# Altium PCB frame_size.PcbDoc
Units mm, origin at the board's own origin, x right, y up, seen from the top; angles counter-clockwise.
Board outline 38.15 x 44.65 mm, 2 copper layers (Top Layer, Bottom Layer); 2 components, 7 nets, 21 pads, 0 vias.
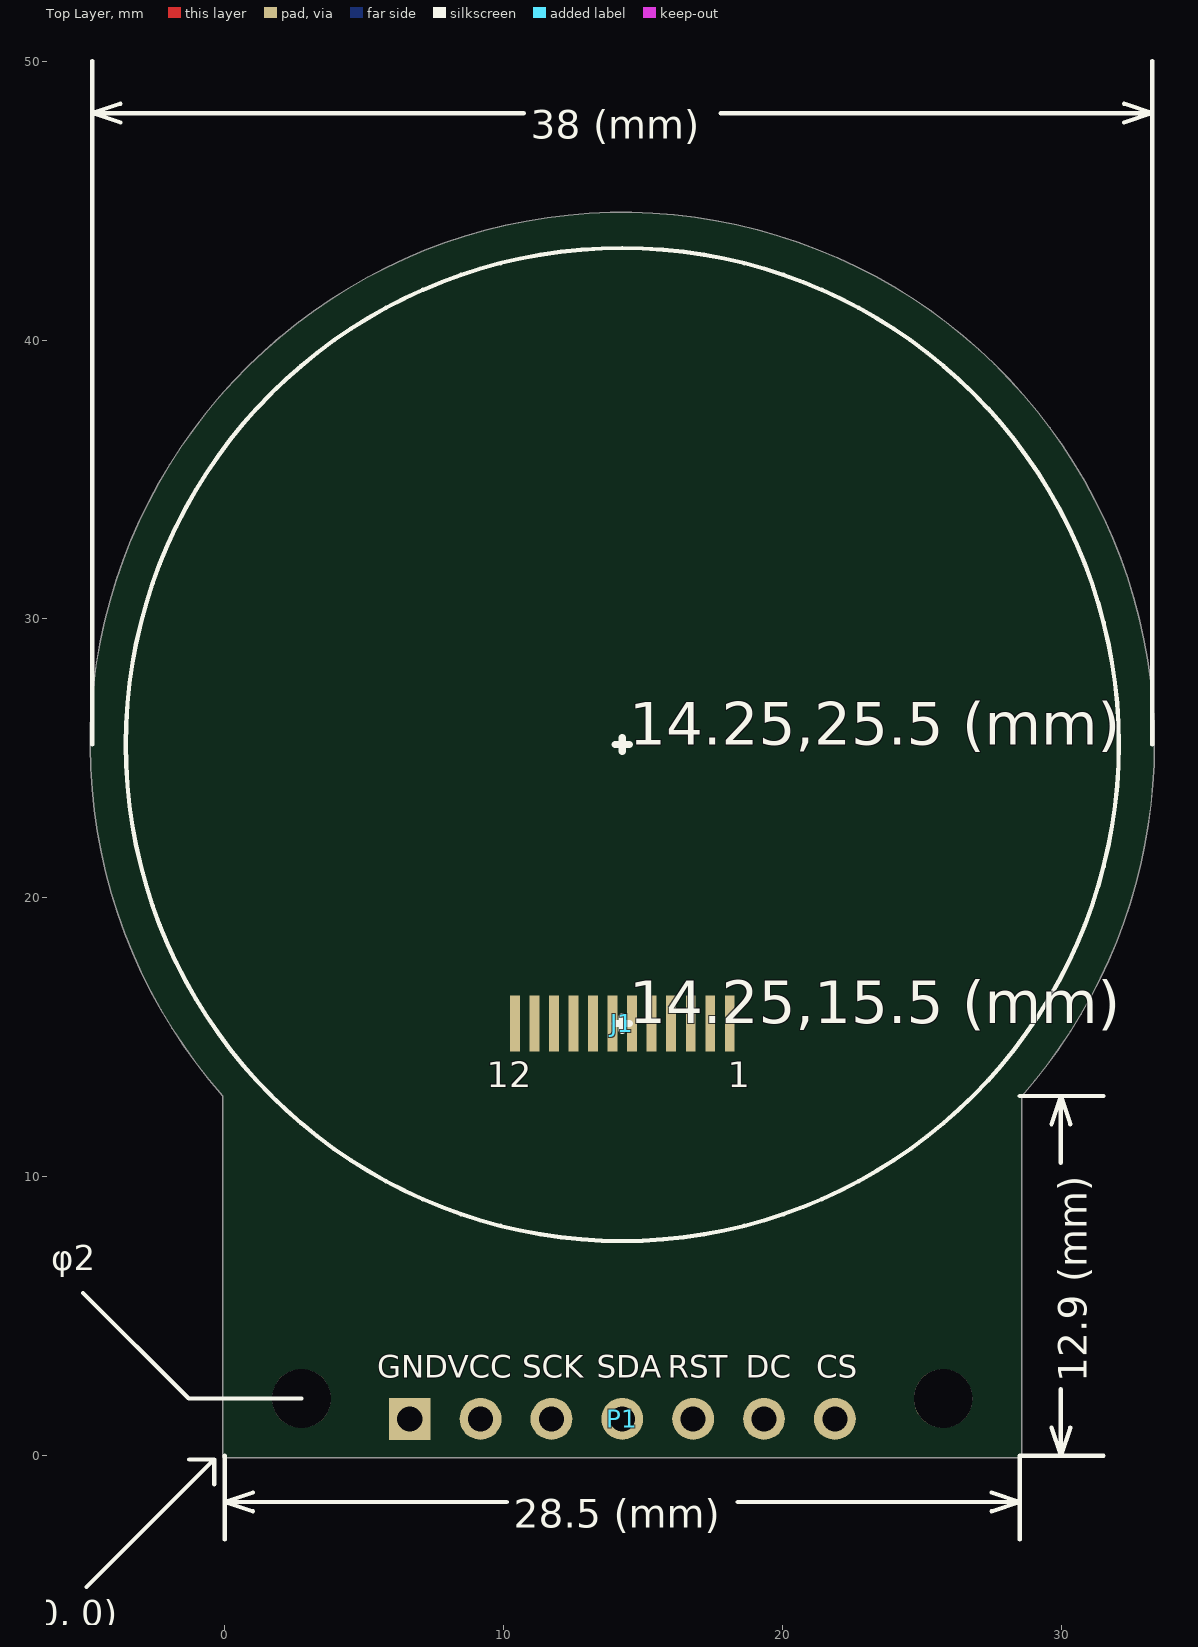
[diagram p0: Top Layer view]
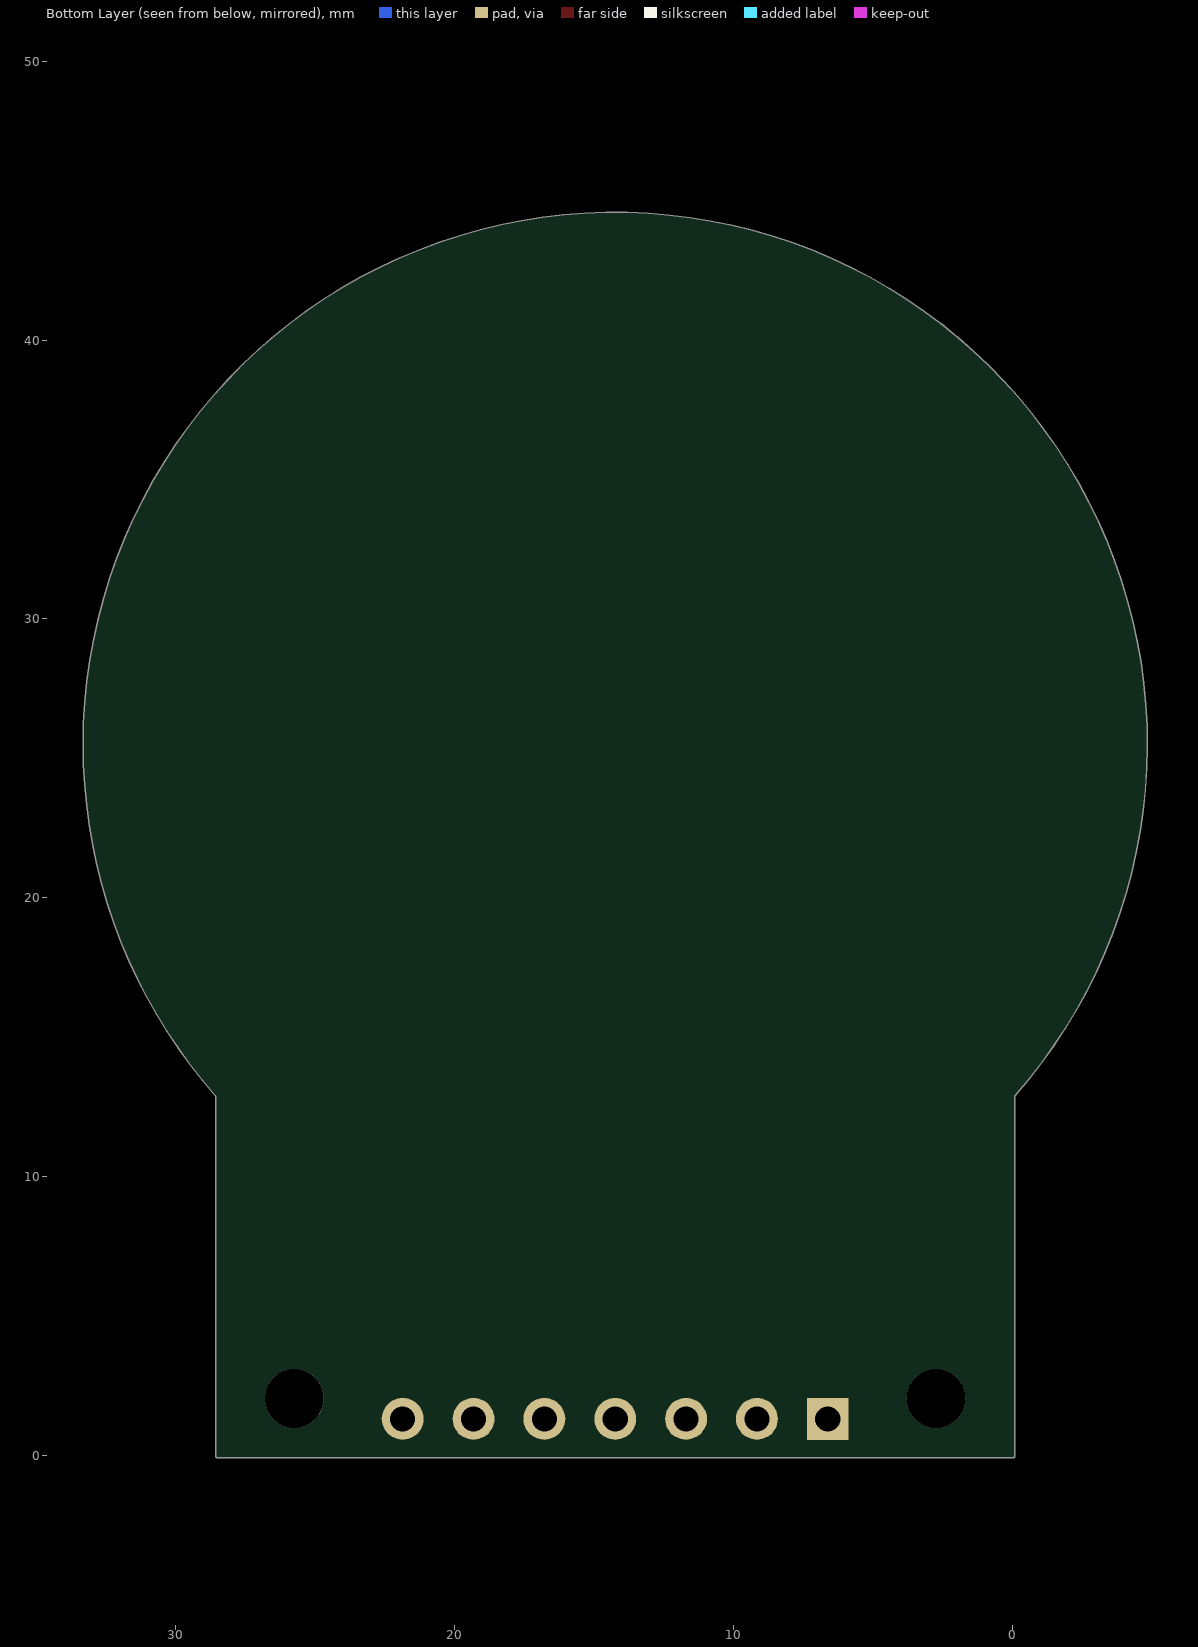
[diagram p1: Bottom Layer view, seen from below]

## Layer stack, top to bottom
Top Solder: solder mask 0.0102, Solder Resist, Dk 3.5
Top Layer: signal copper 0.0356
Dielectric 1: dielectric 0.32, FR-4, Dk 4.8
Bottom Layer: signal copper 0.0356
Bottom Solder: solder mask 0.0102, Solder Resist, Dk 3.5

## Board outline
-0.077,0 -0.077,12.9 cw(c0,12.9) -0.077,12.9 cw(c0,12.9) -0.076,12.904 -0.077,12.904 cw(c14.25,25.5) 33.327,25.5 cw(c14.25,25.5) 28.577,12.904 cw(c28.5,12.901) 28.577,12.901 cw(c28.5,12.901) 28.577,12.9 ccw(c28.5,12.9) 28.576,12.904 28.577,12.9 cw(c28.5,12.9) 28.577,12.9 28.577,0 cw(c28.5,0) 28.5,-0.077 0,-0.077 cw(c0,0)

## Design rules (kind name [scope] priority, off if disabled: settings)
Clearance [All] p1: gap=0.152
PolygonConnect [All] p1: connectstyle=Relief reliefconductorwidth=0.254 reliefentries=4 polygonreliefangle="90 Angle" airgapwidth=0.254
RoutingVias [All] p1: holewidth=0.711 width=1.27 viastyle="Through Hole" minholewidth=0.711 minwidth=1.27 maxholewidth=0.711 maxwidth=1.27
SolderMaskExpansion [All] p1: expansion=0.102
Width [All] p1: maxlimit=0.508 minlimit=0.254 preferedwidth=0.254
30 further rules are at their usual default settings.

## Components (designator, comment, footprint, x,y, rotation, side; value= is the part's Value field where it differs from the comment)
J1 "FPC-12 Connect Pad" "FPC12 PADDING" 14.25,15.5 r0 top
P1 "Header 7" HDR1X7 14.25,1.325 r0 top

## Footprints (in the part's own frame and the unit in brackets; to place one, negate y for a bottom-side part, rotate by r counter-clockwise, add the part's x,y. Pads: shape width x height; smd on the part's side, far side on the other; paste and mask are expansions set on the pad)
"FPC12 PADDING" [mm]
  rect 0.35x2 smd: 1(3.85,0) 2(3.15,0) 3(2.45,0) 4(1.75,0) 5(1.05,0) 6(0.35,0) 7(-0.35,0) 8(-1.05,0) 9(-1.75,0) 10(-2.45,0) 11(-3.15,0) 12(-3.85,0)
HDR1X7 [mm] "Connector; Header; 7 Position"
  rect 1.5x1.5 hole 0.9: 1(-7.62,0)
  round 1.5 hole 0.9: 2(-5.08,0) 3(-2.54,0) 4(0,0) 5(2.54,0) 6(5.08,0) 7(7.62,0)
  body extent -8.89,-1.27 8.89,1.27, height 3.05

## Part data
P1: "Header, 7-Pin"

## Free pads (board coordinates)
  round 2.1 hole 2.1 unplated: ""(2.75,2.055) ""(25.75,2.055)

## Nets (pads, with @x,y where several pads share a name; then routed paths per layer and width w, separated by ;. In a path a pad name is that pad's centre, name@x,y a point inside that pad or via, vN(x,y) a via of type N, cw(c..) or ccw(c..) an arc to the next point about the centre after c; other vN are vias at no path point)
GND: 
LCD_CSX: 
LCD_DCX: 
LCD_RST: 
LCD_SCK: 
LCD_SDA: 
VCC_3V3: 
pads on no net: J1.1 J1.2 J1.3 J1.4 J1.5 J1.6 J1.7 J1.8 J1.9 J1.10 J1.11 J1.12 P1.1 P1.2 P1.3 P1.4 P1.5 P1.6 P1.7

## Silkscreen, mask and mechanical layers (free items; w line width, h text height)
Top Overlay:
  circle w0.152: c14.25,25.5 r17.8
  lines w0.152: -5.08,5.842 -1.293,2.055 2.75,2.055 ; -4.953,-4.699 -0.381,-0.127 ; -4.75,25.5 -4.75,50 ; -4.75,47.879 -4.75,48.387 ; -3.734,47.794 -4.75,48.133 ; -3.734,48.472 -4.75,48.133 ; -0.381,-1.016 -0.381,-0.127 ; 0,-3 0,0 ; 0,-1.905 0,-1.397 ; 1.016,-1.99 0,-1.651 ; 1.016,-1.312 0,-1.651 ; 10.109,-1.651 0,-1.651 ; 10.721,48.133 -4.75,48.133 ; 17.779,48.133 33.25,48.133 ; 18.391,-1.651 28.5,-1.651 ; 27.484,-1.99 28.5,-1.651 ; 27.484,-1.312 28.5,-1.651 ; 28.5,-3 28.5,0 31.5,0 ; 28.5,-1.905 28.5,-1.397 ; 28.5,12.9 31.5,12.9 ; 29.633,1.016 29.972,0 ; 29.633,11.884 29.972,12.9 ; 29.718,0 30.226,0 ; 29.718,12.9 30.226,12.9 ; 29.972,2.389 29.972,0 ; 29.972,10.511 29.972,12.9 ; 30.311,1.016 29.972,0 ; 30.311,11.884 29.972,12.9 ; 32.234,47.794 33.25,48.133 ; 32.234,48.472 33.25,48.133 ; 33.25,25.5 33.25,50 ; 33.25,47.879 33.25,48.387 ; -0.381,-0.127 -1.27,-0.127 -0.381,-0.127
  lines w0.254: 13.996,15.5 14.504,15.5 ; 13.996,25.5 14.504,25.5 ; 14.25,15.246 14.25,15.754 ; 14.25,25.246 14.25,25.754
  text "38 (mm)" at 10.975,47.207 h1.02
  text "14.25,25.5 (mm)" at 14.504,25.5 h1.52
  text "14.25,15.5 (mm)" at 14.504,15.5 h1.52
  text "φ2" at -6.223,6.35 h1.52
  text "GND" at 5.461,2.794 h0.81
  text "VCC" at 8.001,2.794 h0.81
  text "SCK" at 10.668,2.794 h0.81
  text "SDA" at 13.335,2.794 h0.81
  text "RST" at 15.875,2.794 h0.81
  text "DC" at 18.669,2.794 h0.81
  text "CS" at 21.209,2.794 h0.81
  text "12.9 (mm)" at 30.898,2.643 h1.02 r90
  text "28.5 (mm)" at 10.363,-2.577 h1.02
  text "(0, 0)" at -7.239,-6.096 h0.91
Mechanical 1:
  lines w0.152: 0,12.9 0,0 28.5,0 28.5,12.9 ; 0,12.901 0.026,12.927 ; 0.016,12.915 cw(c14.25,25.5) 28.486,12.917 ; 28.474,12.927 28.5,12.901

## Text inside footprints (layer, text, board x,y; h text height)
J1: Top Overlay "1" at 18.034,13.208 h0.91; Top Overlay "12" at 9.398,13.208 h0.91